# Altium PCB eDP Adapter.PcbDoc
Units mil, origin at the board's own origin, x right, y up, seen from the top; angles counter-clockwise.
Board outline 1699.85 x 2500 mil, 4 copper layers (Top Side, Plane 1, Plane 2, Bottom Side), stack 24.296 mil thick; 44 components, 46 nets, 231 pads, 84 vias.
Unrouted connection lines stored in the file: 26.
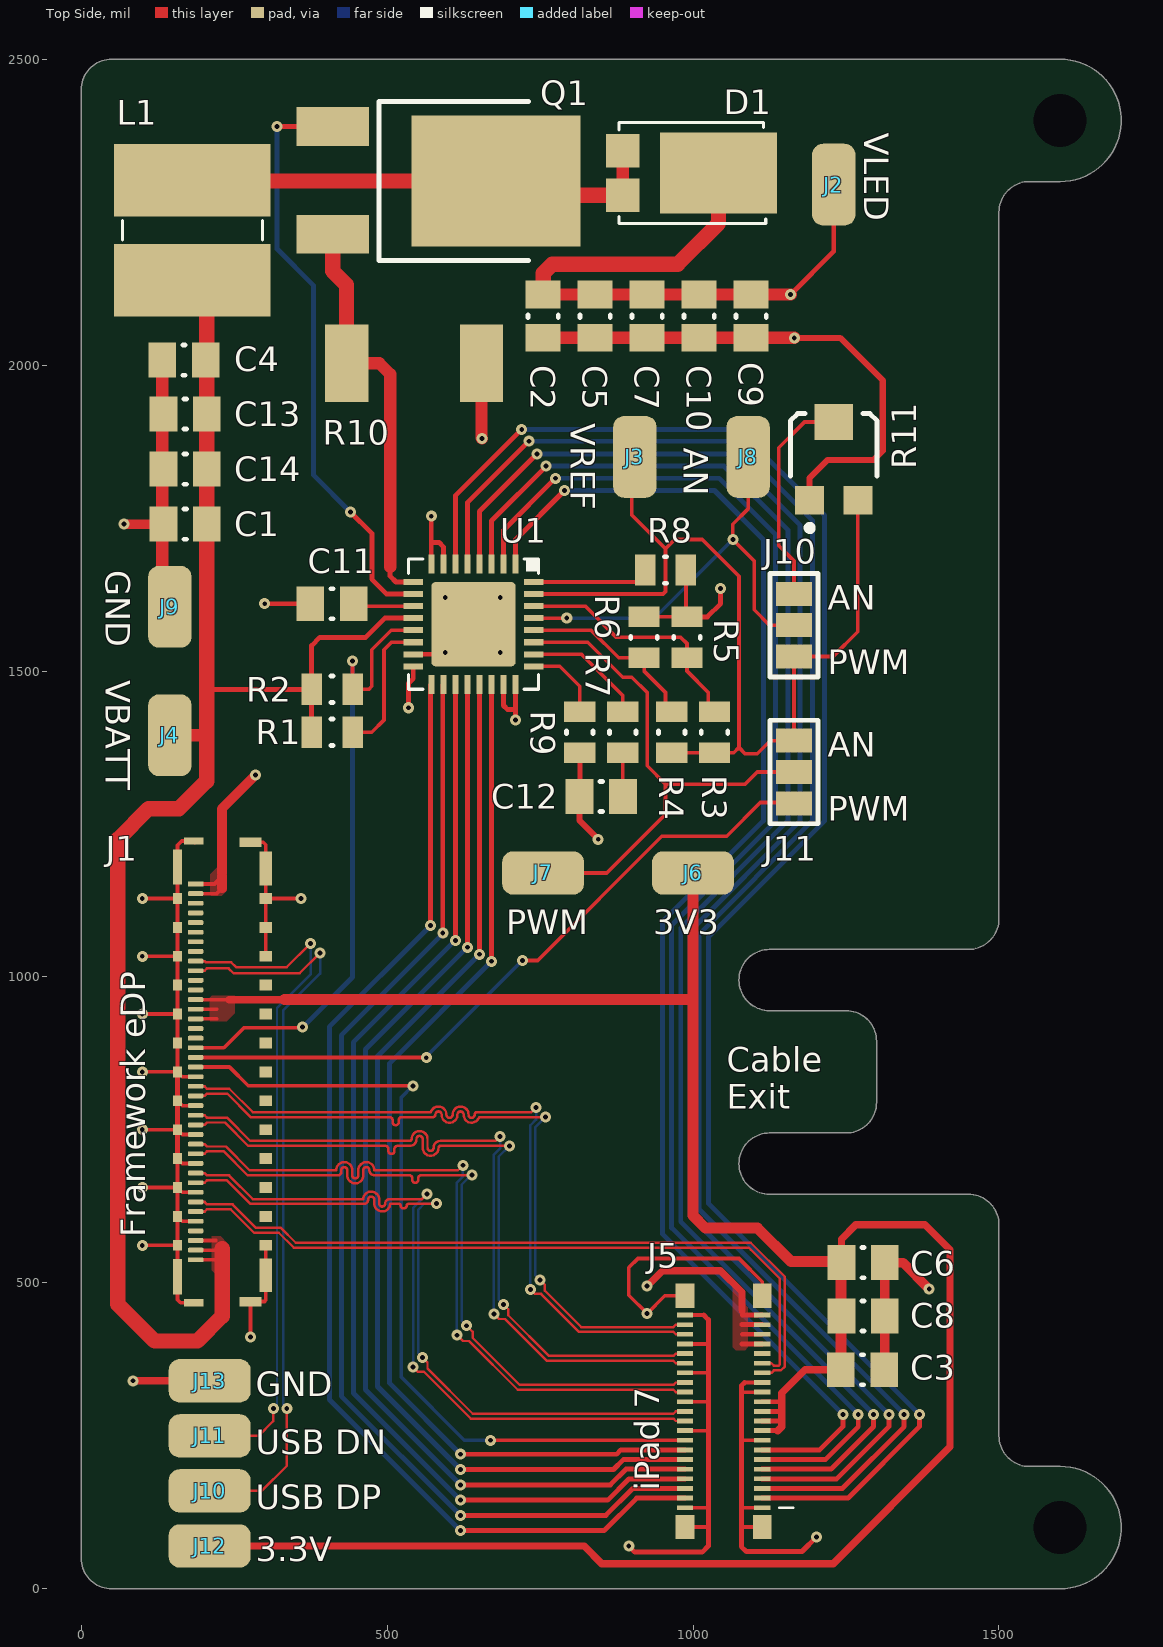
[diagram p0: Top Side view]
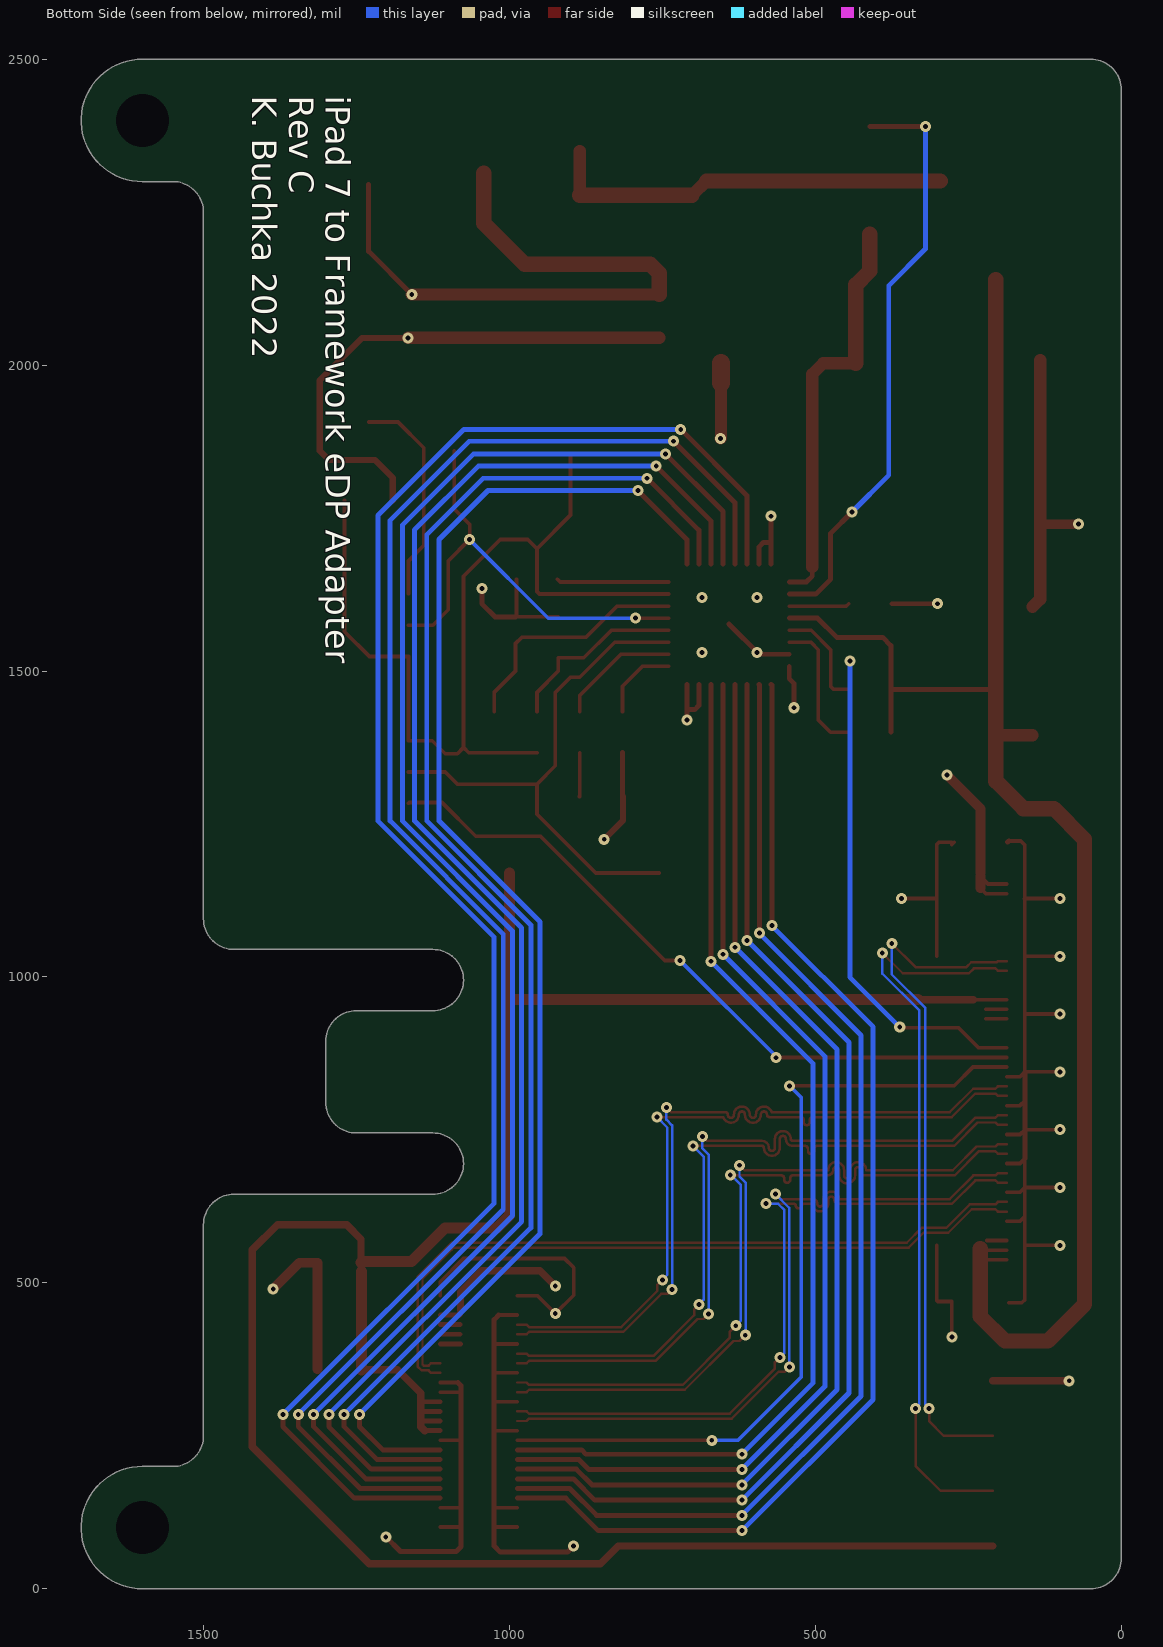
[diagram p1: Bottom Side view, seen from below]
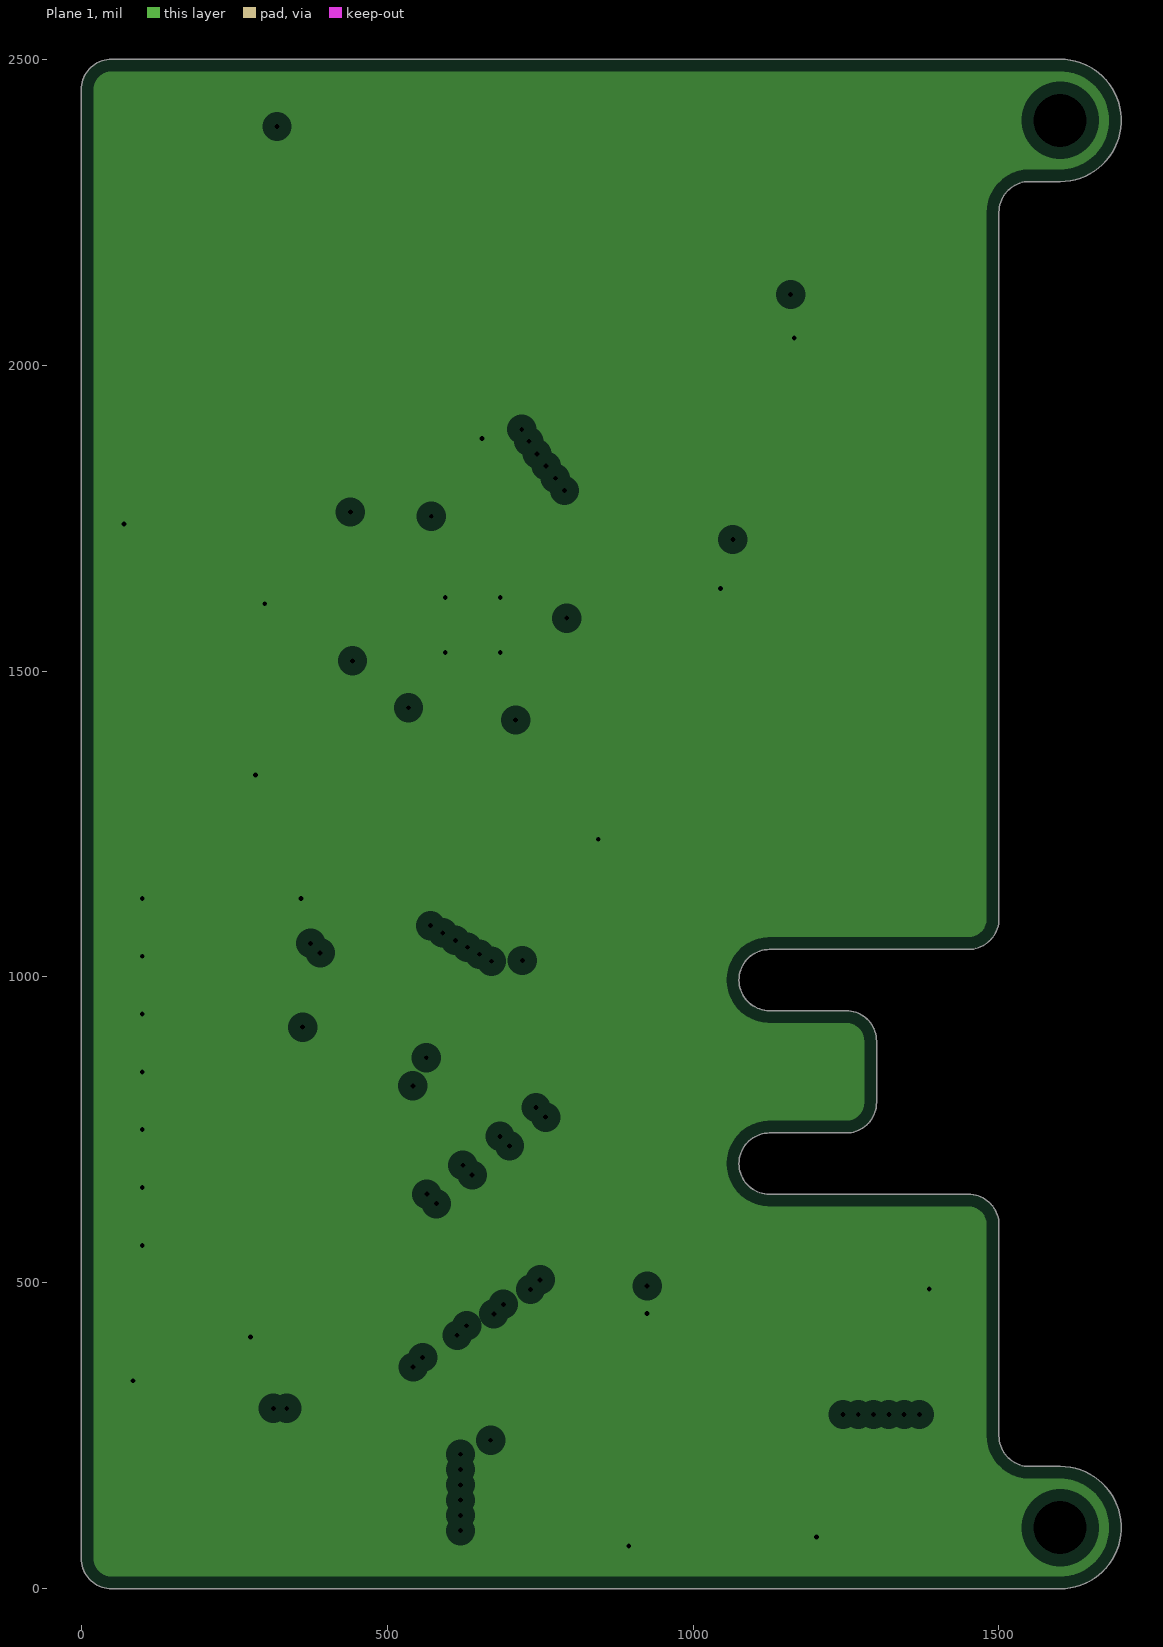
[diagram p2: Plane 1, clearances drawn from the general rule]
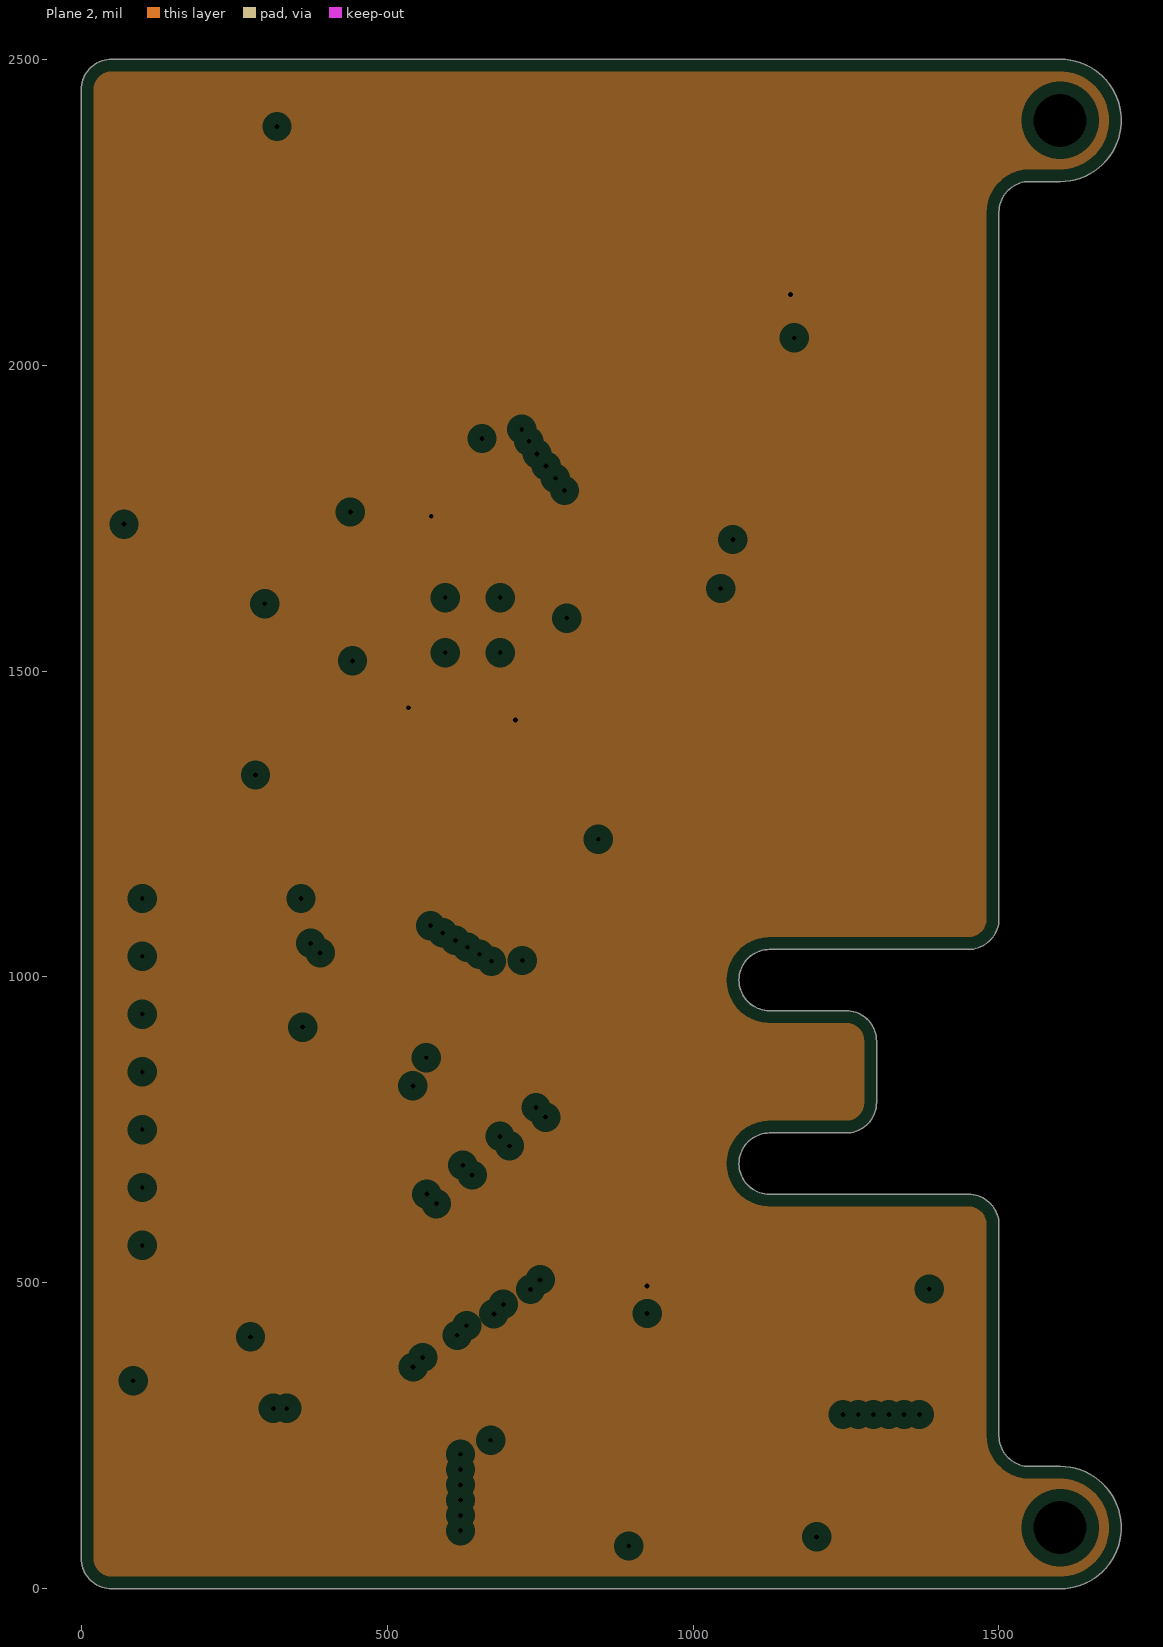
[diagram p3: Plane 2, clearances drawn from the general rule]

## Layer stack, top to bottom
Top Solder: solder mask 0.4, Solder Resist, Dk 3.5
Top Side: signal copper 1.4
Dielectric 1: prepreg 4.331, PP2116, Dk 4.29
Plane 1: plane copper 1.417, net GND
Dielectric 3: core 10, FR-4, Dk 4.2
Plane 2: plane copper 1.417, net VLED
Dielectric 4: prepreg 4.331, PP2116, Dk 4.29
Bottom Side: signal copper 1.4
Bottom Solder: solder mask 0.4, Solder Resist, Dk 3.5

## Board outline
50,0 cw(c50,50) 0,50 0,2450 cw(c50,2450) 50,2500 1500,2500 1600,2500 cw(c1600,2400) 1600,2300 1550,2300 ccw(c1550,2250) 1500,2250 1500,1095 cw(c1450,1095) 1450,1045 1125,1045 ccw(c1125,995) 1075,995 ccw(c1125,995) 1125,945 1250,945 cw(c1250,895) 1300,895 1300,795 cw(c1250,795) 1250,745 1125,745 ccw(c1125,695) 1075,695 ccw(c1125,695) 1125,645 1450,645 cw(c1450,595) 1500,595 1500,250 ccw(c1550,250) 1550,200 1600,200 cw(c1600,100) 1600,0 1500,0

## Design rules (kind name [scope] priority, off if disabled: settings)
Clearance [All] p1: gap=4 ignorepadtopadclearanceinfootprint=FALSE except(0: Arc-Hole Track-Hole SMDPad-Hole THPad-Hole Via-Hole Fill-Hole Poly-Hole Region-Hole Text-Hole)
DiffPairsRouting [All] p1: maxlimit=10 minlimit=4 mostfreqgap=4 toplayer_minwidth=4 toplayer_maxwidth=10 toplayer_prefwidth=4 bottomlayer_minwidth=4 bottomlayer_maxwidth=10 bottomlayer_prefwidth=4 maxuncoupledlength=500
MatchedLengths MatchedLengths_InPairs [InDifferentialPairClass('All Differential Pairs')] p1: tolerance=10 checknetsindiffpair=TRUE checkdiffpairvsdiffpair=FALSE checkxsignals=FALSE checkothers=FALSE
MatchedLengths "MatchedLengths_Between Pairs" [InDifferentialPairClass('EDP_DIFF_CLASS')] p2: tolerance=50 checknetsindiffpair=FALSE checkdiffpairvsdiffpair=TRUE checkxsignals=TRUE checkothers=TRUE
PlaneClearance [All] p1: clearance=20
PlaneConnect [All] p1: planeconnectstyle=Relief reliefexpansion=20 reliefentries=4 reliefconductorwidth=10 reliefairgap=10
PolygonConnect [All] p1: connectstyle=Relief reliefconductorwidth=10 reliefentries=4 polygonreliefangle="90 Angle" airgapwidth=10
RoomDefinition "eDP Adapter" [InComponentClass('eDP Adapter')] p1: confinementstyle=ConfineIn formatcopy=TRUE lockcomponents=FALSE outline -215,-195 8465,-195 8465,4190 -215,4190
RoutingVias [All] p1: holewidth=8 width=18 viastyle="Through Hole" minholewidth=8 minwidth=18 maxholewidth=28 maxwidth=50
SolderMaskExpansion [All] p1: expansion=4
Width [All] p1: maxlimit=30 minlimit=4 preferedwidth=10 minimp=50.000000 maximp=50.000000 favimp=50.000000
27 further rules are at their usual default settings.

## Classes and differential pairs
differential pair class EDP_DIFF_CLASS: EDP_AUX EDP_TX0 EDP_TX1 EDP_TX2 EDP_TX3
net class EDP_LINES: EDP_AUX_N EDP_AUX_P EDP_TX0_N EDP_TX0_P EDP_TX1_N EDP_TX1_P EDP_TX2_N EDP_TX2_P EDP_TX3_N EDP_TX3_P
differential pair EDP_TX3: +EDP_TX3_P -EDP_TX3_N
differential pair EDP_TX2: +EDP_TX2_P -EDP_TX2_N
differential pair EDP_TX1: +EDP_TX1_P -EDP_TX1_N
differential pair EDP_TX0: +EDP_TX0_P -EDP_TX0_N
differential pair EDP_AUX: +EDP_AUX_P -EDP_AUX_N

## Components (designator, comment, footprint, x,y, rotation, side; value= is the part's Value field where it differs from the comment)
C1 "CAP 4.7uF 50V 0805" CAPC0805(2012)145_N 170,1740 r0 top value=1uF
C2 "CAP 4.7uF 50V 0805" CAPC0805(2012)145_N 755,2080 r90 top value=1uF
C3 "CAP 4.7uF 50V 0805" CAPC0805(2012)145_N 1277,358 r180 top value=1uF
C4 "CAP 4.7uF 50V 0805" CAPC0805(2012)145_N 168,2008 r0 top value=1uF
C5 "CAP 4.7uF 50V 0805" CAPC0805(2012)145_N 840,2080 r90 top value=1uF
C6 "CAP 4.7uF 50V 0805" CAPC0805(2012)145_N 1278,533 r180 top value=1uF
C7 "CAP 4.7uF 50V 0805" CAPC0805(2012)145_N 925,2080 r90 top value=1uF
C8 "CAP 4.7uF 50V 0805" CAPC0805(2012)145_N 1278,446 r180 top value=1uF
C9 "CAP 4.7uF 50V 0805" CAPC0805(2012)145_N 1095,2080 r90 top value=1uF
C10 "CAP 4.7uF 50V 0805" CAPC0805(2012)145_N 1010,2080 r90 top value=1uF
C11 "CAP 4.7uF 50V 0805" CAPC0805(2012)145_N 410,1610 r0 top value=1uF
C12 "CAP 4.7nF 50V 0805" CAPC0805(2012)145_N 850,1295 r0 top value=1uF
C13 "CAP 4.7uF 50V 0805" CAPC0805(2012)145_N 170,1920 r0 top value=1uF
C14 "CAP 4.7uF 50V 0805" CAPC0805(2012)145_N 170,1830 r0 top value=1uF
D1 "PDS560-13" PDS560-13 1041.77,2313.78 r0 top
J1 "I-PEX_20879-040E-01" I-PEX_20879-040E-01 187,844.87 r90 top
J2 "RCS-0C" RCS-0C 1230,2295 r180 top
J3 "RCS-0C" RCS-0C 905,1850 r180 top
J4 "RCS-0C" RCS-0C 145,1395 r0 top
J5 "AA03-S042VA1" AA03-S042VA1 1050,290 r270 top
J6 "RCS-0C" RCS-0C 1000,1170 r90 top
J7 "RCS-0C" RCS-0C 755,1170 r90 top
J8 "RCS-0C" RCS-0C 1090,1850 r180 top
J9 "RCS-0C" RCS-0C 145,1605 r180 top
J10 "RCS-0C" RCS-0C 210,160 r90 top
J10 "Jumper SMD 3" "Jumper SMD 3" 1165,1549.41 r90 top
J11 "RCS-0C" RCS-0C 210,250 r90 top
J11 "Jumper SMD 3" "Jumper SMD 3" 1165,1309.41 r90 top
J12 "RCS-0C" RCS-0C 210,70 r90 top
J13 "RCS-0C" RCS-0C 210,340 r90 top
L1 "Inductor CDRH5D28" INDUCTOR_6X6MM_SUMIDA_CDRH5D28 180,2220 r0 top value=22uH
Q1 "NFET" IRLR024NTRPBF 678,2301 r0 top
R1 "RES0805" RESC0805(2012)_L 410,1400 r0 top value=100k
R2 "RES0805" RESC0805(2012)_L 410,1470 r180 top value=100k
R3 "RES0805" RESC0805(2012)_L 1035,1400 r270 top value=20k
R4 "RES0805" RESC0805(2012)_L 965,1400 r270 top value=47k
R5 "RES0805" RESC0805(2012)_L 990,1555 r270 top value=27k
R6 "RES0805" RESC0805(2012)_L 920,1555 r270 top value=20k
R7 "RES0805" RESC0805(2012)_L 885,1400 r90 top value=7.5k
R8 "RES0805" RESC0805(2012)_L 955,1665 r180 top value=15k
R9 "RES0805" RESC0805(2012)_L 815,1400 r90 top value=52k
R10 "2512_RES" 2512 544,2003 r180 top value=0.05R
R11 "TC33X-2-103E" BOUR-TC33X-2_V 1230,1850 r90 top
U1 "LT3754" LT3754 641.1,1576.57 r0 top

## Footprints (in the part's own frame and the unit in brackets; to place one, negate y for a bottom-side part, rotate by r counter-clockwise, add the part's x,y. Pads: shape width x height; smd on the part's side, far side on the other; paste and mask are expansions set on the pad)
2512 [mil] "2512"
  rect 70.87x125.98 smd: 1(-110.24,0) 2(110.24,0)
AA03-S042VA1 [mm] "iPad 7 LCD Connector"
  rect 0.2x0.672 smd: 1(4,1.6) 2(4,-1.6) 3(3.6,1.6) 4(3.6,-1.6) 5(3.2,1.6) 6(3.2,-1.6) 7(2.8,1.6) 8(2.8,-1.6) 9(2.4,1.6) 10(2.4,-1.6) 11(2,1.6) 12(2,-1.6) 13(1.6,1.6) 14(1.6,-1.6) 15(1.2,1.6) 16(1.2,-1.6) 17(0.8,1.6) 18(0.8,-1.6) 19(0.4,1.6) 20(0.4,-1.6) 21(0,1.6) 22(0,-1.6) 23(-0.4,1.6) 24(-0.4,-1.6) 25(-0.8,1.6) 26(-0.8,-1.6) 27(-1.2,1.6) 28(-1.2,-1.6) 29(-1.6,1.6) 30(-1.6,-1.6) 31(-2,1.6) 32(-2,-1.6) 33(-2.4,1.6) 34(-2.4,-1.6) 35(-2.8,1.6) 36(-2.8,-1.6) 37(-3.2,1.6) 38(-3.2,-1.6) 39(-3.6,1.6) 40(-3.6,-1.6) 41(-4,1.6) 42(-4,-1.6)
  rect 1x0.78 smd: 43(4.8,1.6) 44(4.8,-1.6) 45(-4.8,1.6) 46(-4.8,-1.6)
  silkscreen extent 4,2.3 4,2.9
BOUR-TC33X-2_V [mm] "SMD, 3-Leads, Body 3.8x3.6mm"
  rect 1.2x1.2 smd: 1(-1.8,1) 3(-1.8,-1)
  rect 1.5x1.6 smd: 2(1.45,0)
  silkscreen extent -3.07,-1.8 1.8,1.8, body extent -2,-1.8 1.96,1.8, height 1.15
CAPC0805(2012)145_N [mm] "Chip Capacitor, Body 2.0x1.2mm, Height 1.45mm, IPC Medium Density"
  rect 1.15x1.45 smd: 1(-0.9,0) 2(0.9,0)
  silkscreen extent -0.05,-0.62 0.05,0.63, body extent -1.1,-0.72 1.1,0.73, height 1.45
I-PEX_20879-040E-01 [mm] "40 pin micro-coax connector"
  rect 0.2x0.64 smd: 1(7.8,0)
  rrect50% 0.2x0.64 smd: 2(7.4,0) 3(7,0) 4(6.6,0) 5(6.2,0) 6(5.8,0) 7(5.4,0) 8(5,0) 9(4.6,0) 10(4.2,0) 11(3.8,0) 12(3.4,0) 13(3,0) 14(2.6,0) 15(2.2,0) 16(1.8,0) 17(1.4,0) 18(1,0) 19(0.6,0) 20(0.2,0) 21(-0.2,0) 22(-0.6,0) 23(-1,0) 24(-1.4,0) 25(-1.8,0) 26(-2.2,0) 27(-2.6,0) 28(-3,0) 29(-3.4,0) 30(-3.8,0) 31(-4.2,0) 32(-4.6,0) 33(-5,0) 34(-5.4,0) 35(-5.8,0) 36(-6.2,0) 37(-6.6,0) 38(-7,0) 39(-7.4,0) 40(-7.8,0)
  rect 1.4x0.51 smd: 41(-8.44,-2.915) 69(8.44,-2.915)
  rect 1.46x0.36 smd: 42(-8.505,0.75) 74(8.505,0.75)
  rect 0.45x0.36 smd: 43(-7.2,0.75) 44(-6,0.75) 45(-4.8,0.75) 46(-3.6,0.75) 47(-2.4,0.75) 48(-1.2,0.75) 49(0,0.75) 50(1.2,0.75) 51(2.4,0.75) 52(3.6,0.75) 53(4.8,0.75) 54(6,0.75) 55(7.2,0.75)
  rect 0.45x0.51 smd: 56(-7.2,-2.915) 57(-6,-2.915) 58(-4.8,-2.915) 59(-3.6,-2.915) 60(-2.4,-2.915) 61(-1.2,-2.915) 62(0,-2.915) 63(1.2,-2.915) 64(2.4,-2.915) 65(3.6,-2.915) 66(4.8,-2.915) 67(6,-2.915) 68(7.2,-2.915)
  rect 0.3x0.81 smd: 70(-9.585,0.075) 71(9.585,0.075)
  rect 0.4x0.9 smd: 72(-9.535,-2.28) 73(9.535,-2.28)
INDUCTOR_6X6MM_SUMIDA_CDRH5D28 [mm]
  rect 6.5x3 smd: 1(0.047,-2.064) 2(0.047,2.086)
  silkscreen extent -2.85,-0.39 2.95,0.41
IRLR024NTRPBF [mil]
  rect 118x63 smd: 1(-266.94,89) 3(-266.94,-87)
  rect 275.59x214.63 smd: 4(0,0)
  silkscreen extent -191,-130 53,130
"Jumper SMD 3" [mm]
  rect 1x1.5 smd: 1(-0.65,0) 2(0.65,0) 3(1.95,0)
  silkscreen extent -1.5,-1 2.8,1
LT3754 [mil]
  rect 9.84x31.5 smd mask+0: 1(68.9,98.43) 2(49.21,98.43) 3(29.53,98.43) 4(9.84,98.43) 5(-9.84,98.43) 6(-29.53,98.43) 7(-49.21,98.43) 8(-68.9,98.43) 17(-68.9,-98.43) 18(-49.21,-98.43) 19(-29.53,-98.43) 20(-9.84,-98.43) 21(9.84,-98.43) 22(29.53,-98.43) 23(49.21,-98.43) 24(68.9,-98.43)
  rect 31.5x9.84 smd mask+0: 9(-98.43,68.9) 10(-98.43,49.21) 11(-98.43,29.53) 12(-98.43,9.84) 13(-98.43,-9.84) 14(-98.43,-29.53) 15(-98.43,-49.21) 16(-98.43,-68.9) 25(98.43,-68.9) 26(98.43,-49.21) 27(98.43,-29.53) 28(98.43,-9.84) 29(98.43,9.84) 30(98.43,29.53) 31(98.43,49.21) 32(98.43,68.9)
  rrect10% 137.8x137.8 smd paste+0: 33(0,0)
  silkscreen extent -106,-106 106,106
PDS560-13 [mm]
  rect 1.4x1.39 smd: A(-3.982,-0.92) A(-3.982,0.92)
  rect 4.86x3.36 smd: K(0,0)
  silkscreen extent -4.14,-2.1 1.96,2.1
RCS-0C [mm] "1206 Test Point"
  rrect50% 1.8x3.4 smd: 1(0,0)
RESC0805(2012)_L [mm]
  rect 0.85x1.3 smd: 1(-0.85,0) 2(0.85,0)
  silkscreen extent -0.05,-0.55 0.05,0.55, body extent -1.1,-0.67 1.1,0.68, height 0.7

## Part data
C1 C2 C3 C4 C5 C6 C7 C8 C9 C10 C11 C12 C13 C14: library part CMP-1036-04752-1, "CAP 1uF 25V ±5% 0805 (2012 Metric) Thickness 1.45mm SMD", Case-EIA=0805, Case-Metric=2012, Rated Voltage="25 V", Tolerance=±5%, Max Thickness="1.45 mm", Technology=SMT
R1 R2 R3 R4 R5 R6 R7 R8 R9: library part CMP-1591-00002-1, "0805 (2012 Metric) Chip Resistor", Case-EIA=0805, Case-Metric=2012, PackageReference=RESC0805(2012)
R11: library part CMP-2100-03695-1, "Trimming Potentiometer, 10000 Ohm, -40 to 100 degC, 3-Pin SMD, RoHS, Tape and Reel", Case/Package=SMD/SMT, Colour=Silver, Manufacturer=Bourns, Max Operating Temperature=100degC, Max Power Dissipation=100mW, Min Operating Temperature=-40degC, Package Description="3-Pin Surface Mount Device, Body 3.8 x 3.6 mm", Package Quantity=2500, Package Reference=TC33X-2, Resistance=10KOhm, Temperature Coefficient=250ppm/degreesC, Tolerance=25%, Voltage Rating (DC)=50V, Composition=Potentiometer, Contact Plating=Silver, Datasheet URL=http://www.bourns.com/docs/Product-Datasheets/TC33.pdf, Datasheet Version=42583.0, Depth=3.8mm, Height=0.047inch, Lead Free=LeadFree, Length=3mm, Manufacturer URL=http://www.bourns.com/, Military Standard=Not, Mount=SurfaceMount, Number of Turns=1, Packaging=TapeandReel, Power Rating=100mW, Radiation Hardening=No, REACH SVHC=NoSVHC, RoHSCompliant=true, Taper=Linear, Termination=FootPrint, Weight=29.4mg, Width=0.118inch

## Free pads (board coordinates)
  round 0 hole 86.61 unplated: 2(1600,100) 2(1600,2400)

## Via types
v1: diameter 18, hole 8, Top Side to Bottom Side, 84 vias

## Nets (pads, with @x,y where several pads share a name; then routed paths per layer and width w, separated by ;. In a path a pad name is that pad's centre, name@x,y a point inside that pad or via, vN(x,y) a via of type N, cw(c..) or ccw(c..) an arc to the next point about the centre after c; other vN are vias at no path point)
3V3_EDP: C3.2 C6.2 C8.2 J1.13 J1.14 J1.15 J5.17 J5.19 J5.21 J5.23 J6.1 J12.1 | length 4041.7
  Top Side w6: J1.15 221.48,931.48 ; J1.14 221.23,947.23 ; J1.13 242,962.98
  Top Side w8: J5.17 1138.5,258.5 ; J5.19 1144.25,274.25 1145,275 ; J5.21 1144,290 1145,291 ; J5.23 1143.75,305.75 1145,307
  Top Side w12: J12.1 822,70 851,41 1229,41 1420,232 1420,554 1379,595 1266,595 1242.57,571.57 C6.2 ; 242,963 332,963 ; 1138.5,258.5 1145,265 1145,275 1145,291 1145,307 1145,320 1183,358 C3.2
  Top Side w18: 332,963 1000,963 ; J6.1 1000,963 ; C3.2 C6.2@1241.57,518.43 ; C6.2 1240.57,535 1160,535 1105,590 1020,590 1000,610 1000,963
BKOFF: J1.18 R2.1 U1.13 | length 1042.2
  Top Side w6: J1.18 233.24,884.24 266,917 361,917 v1(362,918) ; v1(443.46,1516.54) R2.1 470,1470 475,1475 475,1535 506.73,1566.73 U1.13
  Bottom Side w8: v1(362,918) 443.46,999.46 v1(443.46,1516.54)
BL_AN: J8.1 J10.2 U1.29 | length 738.9
  Top Side w6: U1.29 v1(793.59,1586.41) ; J8.1@1090,1860 J8.1 1090,1765 1065,1740 v1(1065,1715) 1100,1680 1100,1600 1125,1575 J10.2
  Bottom Side w6: v1(793.59,1586.41) 936.41,1586.41 v1(1065,1715)
BL_PWM: J7.1 J11.2 U1.27 | length 888.9
  Top Side w6: U1.27 827.96,1547.04 885,1490 900,1490 925,1465 925,1345 955,1315 ; J7.1 859,1170 955,1266 955,1315 ; J11.2 1105,1335 1085,1315 955,1315
BL_PWM_IN: J1.19 J11.1@1165,1283.82 | length 1152.4
  Top Side w6: J1.19 v1@564,868.49 ; v1(721,1027) 746,1027 949,1230 1055,1230 1110,1285 1163.82,1285 J11.1@1165,1283.82
  Bottom Side w6: v1(564,868) 564,870 v1(721,1027)
EDP_AUX_N: J1.34 J5.29 | length 1201.5
  Top Side w4: J1.34 201.6,632.27 205.47,628.39 247.61,628.39 286,590 326.31,590 350.66,565.66 1094.34,565.66 1150,510 1150,363.55 1143.31,356.87 1132.09,356.87 1128.22,352.99 J5.29
EDP_AUX_P: J1.35 J5.31 | length 1175
  Top Side w4: J1.35 201.6,616.52 205.47,620.39 244.29,620.39 282.69,582 323,582 347.34,557.66 1091.03,557.66 1094.34,554.34 1142,506.69 1142,366.87 1140,364.87 1132.09,364.87 1128.22,368.74 J5.31
EDP_HPD: J1.20 J5.16 | length 1358.4
  Top Side w6: J1.20 242.26,852.74 273,822 v1(542,822) ; v1(669.24,242.76) J5.16
  Bottom Side w6: v1(542,822) 523,803 523,346 626.24,242.76 v1(669.24,242.76)
EDP_TX0_N: J1.31 J5.20 | length 1202.3
  Top Side w4: J1.31 201.6,679.51 205.47,675.64 241.68,675.64 280.31,637 461.02,637 cw(c474,636.22) 487,636.22 487,629.78 ccw(c492,629.78) 497,629.78 cw(c504.22,629.78) 504.22,637 557,637 v1(565,645) ; v1(542.44,362.44) 549.89,355 559.79,355 636.66,278.13 967.91,278.13 971.78,274.25 J5.20
  Bottom Side w4: v1(542.44,362.44) 542.61,362.61 542.61,622.61 v1(565,645)
EDP_TX0_P: J1.32 J5.22 | length 1202.9
  Top Side w4: J1.32 201.6,663.76 205.47,667.64 238.36,667.64 277,629 461.78,629 ccw(c461.78,636.22) 469,636.22 cw(c474,636.22) 479,636.22 479,629.78 ccw(c492,629.78) 504.98,629 515,629 519.78,629 cw(c519.78,626.78) 522,626.78 ccw(c527,626.78) 527,621.78 ccw(c527,626.78) 532,626.78 cw(c534.22,626.78) 534.22,629 537,629 557,629 580.11,629 v1(580.56,629.44) ; v1(558,378) 566,370 566,360.1 639.98,286.13 967.91,286.13 971.78,290 J5.22
  Bottom Side w4: v1(558,378) 550.61,385.39 550.61,619.29 560.76,629.44 v1(580.56,629.44)
EDP_TX1_N: J1.28 J5.26 | length 1203.2
  Top Side w4: J1.28 201.6,726.76 205.47,722.88 236.43,722.88 275.31,684 417,684 ; 417,684.22 cw(c430,684.22) 443,684.22 443,675.78 ccw(c448,675.78) 453,675.78 453,684.22 cw(c466,684.22) 479,684.22 ; 479.22,684 508,684 615.64,684 v1(623.89,692.25) ; v1(614.44,414.44) 623.89,405 633.79,405 713.42,325.37 967.91,325.37 971.78,321.5 J5.26
  Bottom Side w4: v1(614.44,414.44) 614,414.89 614,664.1 623.89,673.99 v1(623.89,692.25)
EDP_TX1_P: J1.29 J5.28 | length 1208.9
  Top Side w4: J1.29 201.6,711.01 205.47,714.88 233.12,714.88 272,676 420,676 ccw(c420,681) 425,681 425,684.22 cw(c430,684.22) 435,684.22 435,675.78 ccw(c448,675.78) 461,675.78 461,684.22 cw(c466,684.22) 471,684.22 ccw(c479.22,684.22) 479.22,676 508,676 526,676 531,676 536,676 cw(c536,671) 541,671 541,668.78 ccw(c546,668.78) 546,663.78 ccw(c546,668.78) 551,668.78 551,671 cw(c556,671) 556,676 561,676 567,676 615.64,676 v1@639,676 ; v1(630,430) 640,420 640,410.1 716.73,333.37 967.91,333.37 971.78,337.24 J5.28 ; v1@639,671 v1@639,676 ; v1(639,676.25) v1@639,676
  Bottom Side w4: v1(630,430) 622,438 622,660.79 639,677.79 v1(639,676.25)
EDP_TX2_N: J1.25 J5.32 | length 1201.5
  Top Side w4: J1.25 201.6,774 205.47,770.13 238.19,770.13 276.31,732 537,732 ccw(c537,735) 540,735 ; 540,735.22 cw(c553,735.22) 566,735.22 566,720.78 ccw(c571,720.78) 576,720.78 cw(c587.22,720.78) 587.22,732 677,732 v1(684.56,739.56) ; v1(674.44,449.44) 682.89,441 692.79,441 761.17,372.61 967.91,372.61 971.78,368.74 J5.32
  Bottom Side w4: v1(674.44,449.44) 674.44,709.64 684.56,719.76 v1(684.56,739.56)
EDP_TX2_P: J1.26 J5.34 | length 1200.3
  Top Side w4: J1.26 201.6,758.25 205.47,762.13 234.87,762.13 273,724 496,724 497,724 cw(c497,719) 502,719 502,715.78 ccw(c507,715.78) 507,710.78 ccw(c507,715.78) 512,715.78 512,719 cw(c517,719) 517,724 537,724 ccw(c537,735) 548,735 ; 548,735.22 cw(c553,735.22) 558,735.22 558,720.78 ccw(c571,720.78) 584,720.78 cw(c587.22,720.78) 587.22,724 677,724 v1(700.11,724) ; v1(690,465) 698,457 698,447.1 764.49,380.61 967.91,380.61 971.78,384.49 J5.34
  Bottom Side w4: v1(690,465) 682.44,472.56 682.44,706.33 v1(700.11,724)
EDP_TX3_N: J1.22 J5.38 | length 1201.5
  Top Side w4: J1.22 201.6,821.24 205.47,817.37 241.94,817.37 280.31,779 571.56,779 cw(c584,775.22) 597,775.22 ; 597,774.78 ccw(c602,774.78) 607,774.78 ; 607,775.22 cw(c620,775.22) 633,775.22 ; 633,774.78 ccw(c638,774.78) 643,774.78 ; 643,774.89 cw(c647,775) 647,779 735.89,779 v1(743.44,786.56) ; v1(734.44,489.44) 741.89,482 751.79,482 813.93,419.86 967.91,419.86 971.78,415.98 J5.38
  Bottom Side w4: v1(734.44,489.44) 734,489.89 734,757.31 743.44,766.76 v1(743.44,786.56)
EDP_TX3_P: J1.23 J5.40 | length 1205
  Top Side w4: J1.23 201.6,805.5 205.47,809.37 238.63,809.37 277,771 495,771 499,771 504,771 cw(c504,766) 509,766 509,762.78 ccw(c514,762.78) 514,757.78 ccw(c514,762.78) 519,762.78 519,766 cw(c524,766) 524,771 575,771 ccw(c575,775) 579,775 ; 579,775.22 cw(c584,775.22) 589,775.22 ; 589,774.78 ccw(c602,774.78) 615,774.78 ; 615,775.22 cw(c620,775.22) 625,775.22 ; 625,774.78 ccw(c638,774.78) 650.44,771 735.89,771 v1(759,771) v1@755.61,774.39 ; v1(750,505) 758,497 758,487.1 817.24,427.86 967.91,427.86 971.78,431.73 J5.40
  Bottom Side w4: v1(750,505) 742,513 742,754 v1(759,771)
GND: C1.1 C2.1 C3.1 C4.1 C5.1 C6.1 C7.1 C8.1 C9.1 C10.1 C11.1 C12.1 C13.1 C14.1 J1.1 J1.2 J1.21 J1.24 J1.27 J1.30 J1.33 J1.36 J1.41 J1.42 J1.43 J1.44 J1.45 J1.46 J1.47 J1.48 J1.49 J1.50 J1.51 J1.52 J1.53 J1.54 J1.55 J1.56 J1.57 J1.58 J1.59 J1.60 J1.61 J1.62 J1.63 J1.64 J1.65 J1.66 J1.67 J1.68 J1.69 J1.70 J1.71 J1.72 J1.73 J1.74 J5.1 J5.2 J5.15 J5.18 J5.24 J5.25 J5.27 J5.30 J5.36 J5.42 J5.43 J5.44 J5.45 J5.46 J9.1 J13.1 R5.1 R6.1 R8.1 R9.1 R10.1 R11.1 U1.15 U1.33 | length 6348.7
  Top Side w6: v1(99.87,561.4) J1.43 ; v1(99.87,655.89) J1.45 ; v1(99.87,750.38) J1.47 165.35,742.5 J1.27 ; v1(99.87,844.87) J1.49 ; v1(99.87,939.35) J1.51 ; v1(99.87,1033.84) J1.53 ; v1(99.87,1128.33) J1.55 ; J1.48 165.35,789.75 J1.24 ; J1.55@158.47,1127.6 J1.55@157.47,1127.6 ; J1.71@183.65,1222.23 164.23,1222.23 157.47,1215.47 J1.74 J1.55 ; J1.70 162.5,467.5 157.47,472.53 J1.42 J1.43 ; J1.36 165.35,600.77 J1.44 ; J1.33 165.35,648.02 J1.45 ; J1.30 165.35,695.26 J1.46 J1.45 ; J1.21 165.35,836.99 J1.49 ; J1.2 221.2,1136.2 230,1145 ; J1.1 217.95,1151.95 230,1164 ; J1.73@272.74,1220.26 J1.73@276.96,1216.04 ; v1(276.76,411.87) J1.72 299.47,469.47 301.76,471.76 J1.41 J1.56 ; J1.73 297.74,1220.26 301.76,1216.24 J1.69 J1.68 ; J1.66 J1.67 J1.68 ; v1(359.37,1128.33) J1.68 ; R6.1 R5.1 988.46,1590 R8.1@988.46,1650 ; J5.44 1024.02,101.02 1025,102 ; J5.2 1023.52,132.52 1025,134 ; J5.18 1024.5,258.5 1025,259 ; J5.24 1024.75,305.75 1025,306 ; J5.30 1024.01,352.99 1025,352 ; J5.36 1024.76,400.24 1025,400 ; J5.42 1017.52,447.48 ; J5.46 953.98,478.98 v1(925,450) 895,480 895,525 910,540 1075,540 1112.99,502.01 J5.45 ; 1079.02,101.02 J5.43 ; 1079,133 1079.48,132.52 J5.1 ; 1079,243 1079.24,242.76 J5.15 ; 1079,321 1079.5,321.5 J5.25 ; 1084.24,337.24 J5.27 ; J1.43 J1.44 ; J1.44 J1.45 ; J1.49 J1.50 J1.51 ; J1.51 J1.52 J1.53 ; J1.53 J1.54 J1.55@157.47,1127.6 ; J1.55@157.47,1127.6 J1.55
  Top Side w8: J1.46 J1.47 J1.48 J1.49 ; J1.71@183.65,1222.23 J1.71@185.62,1220.26 ; v1(300,1610) C11.1 ; U1.15 591.89,1527.36 U1.33 ; C12.1 815,1295.43 R9.1 ; v1(895,70) 905,60 1015,60 1025,70 1025,102 1025,134 1025,259 1025,306 1025,352 1025,400 1025,440 1017.52,447.48 ; R5.1 1023.46,1588.46 1045,1610 v1(1045,1635) ; 1084.24,337.24 1079,332 1079,321 1079,243 1079,133 1079,101 1079,69 1087,61 1178,61 v1(1202,85)
  Top Side w10: C12.1 814.57,1255.43 v1(845,1225) ; v1(1165.43,2044.57) 1240.43,2044.57 1310,1975 1310,1860 1295,1845 1220,1845 1190.63,1815.63 R11.1 ; C3.1 C3.1@1313.43,359
  Top Side w12: v1(85,340) J13.1
  Top Side w16: v1(70,1740) C1.1@132.57,1740 ; 230,1145 230,1164 ; 230,1170 230,1275 v1(285,1330) ; C3.1@1313.43,359 C8.1 C6.1 1343,533 v1(1386,490)
  Top Side w20: C4.1 132.57,1740 132.57,1617.43 J9.1 ; R10.1@654.24,1970.76 654.24,1880.76 v1(655,1880) ; C2.1 C5.1 C7.1 C10.1 C9.1 v1(1165.43,2044.57)
  Top Side w30: R10.1@654.24,1970.76 R10.1
  other v1: 595,1530 685,1530 595,1620 685,1620
LED_A1: J5.13 U1.1 | length 2299.6
  Top Side w8: U1.1 710,1715 v1(790,1795) ; J5.13 1207.01,227.01 1245,265 v1(1245,285)
  Bottom Side w8: v1(790,1795) 1035,1795 1115,1715 1115,1255 950,1090 950,580 v1(1245,285)
LED_A2: J5.11 U1.2 | length 2407.1
  Top Side w8: U1.2 690.31,1730.31 v1(775,1815) ; J5.11 1216.26,211.26 1270,265 v1(1270,285)
  Bottom Side w8: v1(775,1815) 1042.85,1815 1135,1722.85 1135,1255 965,1085 965,590 v1(1270,285)
LED_A3: J5.9 U1.3 | length 2514.7
  Top Side w8: U1.3 670.63,1745.63 v1(760,1835) ; J5.9 1225.51,195.51 1295,265 v1(1295,285)
  Bottom Side w8: v1(760,1835) 1050.68,1835 1155,1730.68 1155,1255 980,1080 980,600 v1(1295,285)
LED_A4: J5.7 U1.4 | length 2622.2
  Top Side w8: U1.4 650.94,1760.94 v1(745,1855) ; J5.7 1234.76,179.76 1320,265 v1(1320,285)
  Bottom Side w8: v1(745,1855) 1058.52,1855 1175,1738.52 1175,1255 995,1075 995,610 v1(1320,285)
LED_A5: J5.5 U1.5 | length 2729.6
  Top Side w8: U1.5 631.26,1775.15 v1(731.75,1875.63) ; J5.5 1244.02,164.02 1345,265 v1(1345,285)
  Bottom Side w8: v1(731.75,1875.63) 1065.72,1875.63 1195,1746.36 1195,1255 1010,1070 1010,620 v1(1345,285)
LED_A6: J5.3 U1.6 | length 2834.4
  Top Side w8: U1.6 611.57,1786.57 v1(720,1895) ; J5.3 1253.27,148.27 1370,265 v1(1370,285)
  Bottom Side w8: v1(720,1895) 1074.2,1895 1215,1754.2 1215,1255 1025,1065 1025,630 v1(1370,285)
LED_B1: J5.14 U1.22 | length 1745.1
  Top Side w8: v1(620,220) 875,220 882.01,227.01 J5.14 ; v1(670.63,1025.63) U1.22
  Bottom Side w8: v1(620,220) 504,336 504,859 v1(670.63,1025.63)
LED_B2: J5.12 U1.21 | length 1782.1
  Top Side w8: v1(620,195) 870,195 886.26,211.26 J5.12 ; v1(650.94,1037.05) U1.21
  Bottom Side w8: v1(620,195) 484.31,330.69 484.31,870.42 v1(650.94,1037.05)
LED_B3: J5.10 U1.20 | length 1819.1
  Top Side w8: v1(620,170) 865,170 890.51,195.51 J5.10 ; v1(631.26,1048.49) U1.20
  Bottom Side w8: v1(620,170) 464.63,325.37 464.63,881.86 v1(631.26,1048.49)
LED_B4: J5.8 U1.19 | length 1856.1
  Top Side w8: v1(611.57,1059.91) U1.19 ; v1(620,145) 860.49,145 895.25,179.76 J5.8
  Bottom Side w8: v1(611.57,1059.91) 444.94,893.28 444.94,320.06 v1(620,145)
LED_B5: J5.6 U1.18 | length 1891.5
  Top Side w8: v1(591,1072) 591,1477.25 U1.18 ; v1(620,120) 857.49,120 901.51,164.02 J5.6
  Bottom Side w8: v1@591,1070.45 425.26,904.71 425.26,314.74 v1(620,120)
LED_B6: J5.4 U1.17 | length 1930.1
  Top Side w8: v1(571,1084) 571,1476.94 U1.17 ; v1(620,95) 854.49,95 907.76,148.27 J5.4
  Bottom Side w8: v1(571,1084) 405.57,918.57 405.57,309.43 v1(620,95)
NetC11_2: C11.2 U1.11 | length 98.9
  Top Side w6: C11.2 449.33,1606.1 U1.11
NetC12_2: C12.2 R7.1 | length 71.7
  Top Side w6: R7.1 885,1295.43 C12.2
NetD1_A: D1.A L1.2 Q1.4 | length 671.1
  Top Side w20: Q1.4 Q1.4@701.44,2277.56 ; D1.A@885,2277.56 D1.A@885,2350
  Top Side w25: L1.2@296,2301 Q1.4 ; Q1.4@701.44,2277.56 D1.A@885,2277.56
NetJ10_3: J10.3 R11.2 | length 356.6
  Top Side w6: J10.3 1165,1680 1140,1705 1140,1865 1182.09,1907.09 R11.2
NetQ1_1: Q1.1 U1.10 | length 973
  Top Side w8: v1(320,2390) Q1.1 ; v1(440,1760) 475,1725 475,1650 499.22,1625.78 U1.10
  Bottom Side w8: v1(320,2390) 320,2190 380,2130 380,1820 v1(440,1760)
NetQ1_3: Q1.3 R10.2 U1.9 | length 670.7
  Top Side w8: 505,1670 505,1655 514.53,1645.47 U1.9
  Top Side w20: R10.2 487,2003 505,1985 505,1670
  Top Side w25: Q1.3 411.06,2153.94 433.76,2131.24 R10.2
NetR1_2: R1.2 U1.14 | length 227.5
  Top Side w6: R1.2 475,1400 495,1420 495,1535 507.04,1547.04 U1.14
NetR3_1: R3.1 R5.2 U1.30 | length 401.8
  Top Side w6: U1.30 823.9,1606.1 875,1555 980,1555 990,1545 R5.2 990,1500 1025,1465 R3.1@1025,1433.46
NetR4_1: R4.1 R6.2 U1.28 | length 301.8
  Top Side w6: U1.28 833.27,1566.73 878.46,1521.54 R6.2 920,1500 955,1465 R4.1@955,1433.46
NetR7_2: R7.2 U1.26 | length 199.9
  Top Side w6: U1.26 817.64,1527.36 885,1460 R7.2
NetR8_2: R8.2 U1.32 | length 183.9
  Top Side w6: U1.32 917.01,1645.47 R8.2@921.54,1650
NetR9_2: R9.2 U1.25 | length 130.5
  Top Side w6: U1.25 782.33,1507.67 815,1475 R9.2
USB_DN: J1.9 J11.1@210,250 | length 1128.5
  Top Side w4: J1.9 201.6,1025.97 203.47,1024.09 245.05,1024.09 253.14,1016 336,1016 v1(375,1055) ; J11.1@210,250 290,250 314,274 v1(314,295)
  Bottom Side w4: v1(314,295) 320,301 320,949.14 375,1004.14 v1(375,1055)
USB_DP: J1.10 J10.1@210,160 | length 1231.4
  Top Side w4: J1.10 201.6,1010.22 205.47,1014.09 240.91,1014.09 249,1006 357.11,1006 v1(390.56,1039.44) ; J10.1@210,160 295,160 336,201 v1(336,295)
  Bottom Side w4: v1(336,295) 330,301 330,945 390.56,1005.56 v1(390.56,1039.44)
VBATT: C1.2 C4.2 C13.2 C14.2 J1.38 J1.39 J1.40 J4.1 L1.1 R1.1 R2.2 U1.12 | length 2749.2
  Top Side w6: J1.40 224.78,537.78 ; J1.39 220.53,553.53 ; J1.38 219.72,569.28
  Top Side w8: 205,1471 206,1470 R2.2 ; R1.1 R2.2 ; U1.12 496.41,1586.41 465,1555 390.02,1555 376.54,1541.52 R2.2
  Top Side w20: J4.1 205,1395
  Top Side w25: L1.1@205,2140 205,1920 205,1471 205,1395 205,1320 160,1275 110,1275 60,1225 60,465 120,405 190,405 230.5,445.5 230.5,556
VLED: C2.2 C5.2 C7.2 C9.2 C10.2 D1.K J2.1 J5.35 J5.37 J5.39 J5.41 U1.7 U1.8 U1.16 U1.23 U1.24 | length 1722.1
  Top Side w8: v1(535,1440) 535,1480 542.67,1487.67 U1.16 ; U1.8 572.2,1710 ; v1(572.2,1753) 572.2,1710 ; U1.7 591.89,1703.11 585,1710 572.2,1710 ; U1.23 690.31,1443.69 697.08,1436.92 710,1436.92 v1(710,1420) U1.24 ; 1080,400.24 J5.35 ; 1080.27,431.73 J5.39 ; 1080.52,447.48 J5.41 ; 1081.02,415.98 J5.37 ; v1(1159.57,2115.43) 1230,2185.87 J2.1
  Top Side w12: v1(925,495) 950,520 1045,520 1080,485 1080,455
  Top Side w20: C2.2 C5.2 C7.2 C10.2 C9.2 v1(1159.57,2115.43)
  Top Side w25: C2.2 755,2150 770,2165 975,2165 1041.77,2231.77 D1.K
VREF: J3.1 J10.1@1165,1523.82 J11.3 R3.2 R4.2 R11.3 U1.31 | length 1596.1
  Top Side w6: U1.31 950.78,1625.78 955,1630 955,1700 ; J3.1@900,1855 900,1755 955,1700 ; R4.2@955,1366.54 R4.2 R3.2 1066.54,1366.54 1075,1375 ; R11.3 1269.37,1564.37 1228.82,1523.82 1165,1523.82 J11.3 1126.18,1386.18 1105,1365 1085,1365 1075,1375 ; 955,1700 970,1715 1015,1715 1075,1655 1075,1375
pads on no net: J1.3 J1.4 J1.5 J1.6 J1.7 J1.8 J1.11 J1.12 J1.16 J1.17 J1.37 J5.33

## Polygon pours and split planes (outlines as drawn)
GND on Top Side (solid, pour order 26): 211,1168 223,1180 236,1180 238,1178 238,1141 230,1133 212,1133 211,1134
3V3_EDP on Top Side (solid, pour order 24): 251,969 251,941 238,928 211,928 210,929 210,966 213,969
VLED on Top Side "Top Side-VLED" (solid, pour order 22): 1090,395 1085,390 1070,390 1065,395 1065,495 1075,495 1075,475 1090,460
VBATT on Top Side "Top Side-VBATT" (solid, pour order 20): 223,471 238,471 238,566 228,576 213,576 213,521 223,511
GND on Plane 1 (split plane): 268 vertices, not listed, extent 20.05,20.03 1680,2479.97
VLED on Plane 2 (split plane): 268 vertices, not listed, extent 20.05,20.03 1680,2479.97

## Silkscreen, mask and mechanical layers (free items; w line width, h text height)
Top Overlay:
  text "VLED" at 1280,2380 h40 r270
  text "VREF" at 800,1905 h40 r270
  text "AN" at 985,1865 h40 r270
  text "GND" at 40,1665 h40 r270
  text "AN" at 1220,1600 h40
  text "PWM" at 1220,1495 h40
  text "VBATT" at 40,1485 h40 r270
  text "AN" at 1220,1360 h40
  text "PWM" at 1220,1255 h40
  text "PWM" at 695,1070 h40
  text "3V3" at 935,1070 h40
  text "Cable / Exit" at 1055,785 h40
  text "Framework eDP" at 105,575 h40 r90
  text "GND" at 285,315 h40
  text "USB DN" at 285,220 h40
  text "iPad 7" at 945,160 h40 r90
  text "USB DP" at 285,130 h40
  text "3.3V" at 285,45 h40
Bottom Overlay:
  text "iPad 7 to Framework eDP Adapter / Rev C / K. Buchka 2022" at 1420,2440 h40 r90
Mechanical 30:
  the board outline again, w3.94

## Text inside footprints (layer, text, board x,y; h text height)
J1: Mechanical 1 "Cable exit" at 395.66,651.95 h39.37 r90